# Altium PCB PCB2.PcbDoc
Units mil, origin at the board's own origin, x right, y up, seen from the top; angles counter-clockwise.
Board outline 2365 x 3675 mil, 2 copper layers (Top Layer, Bottom Layer); 23 components, 35 nets, 136 pads, 30 vias.
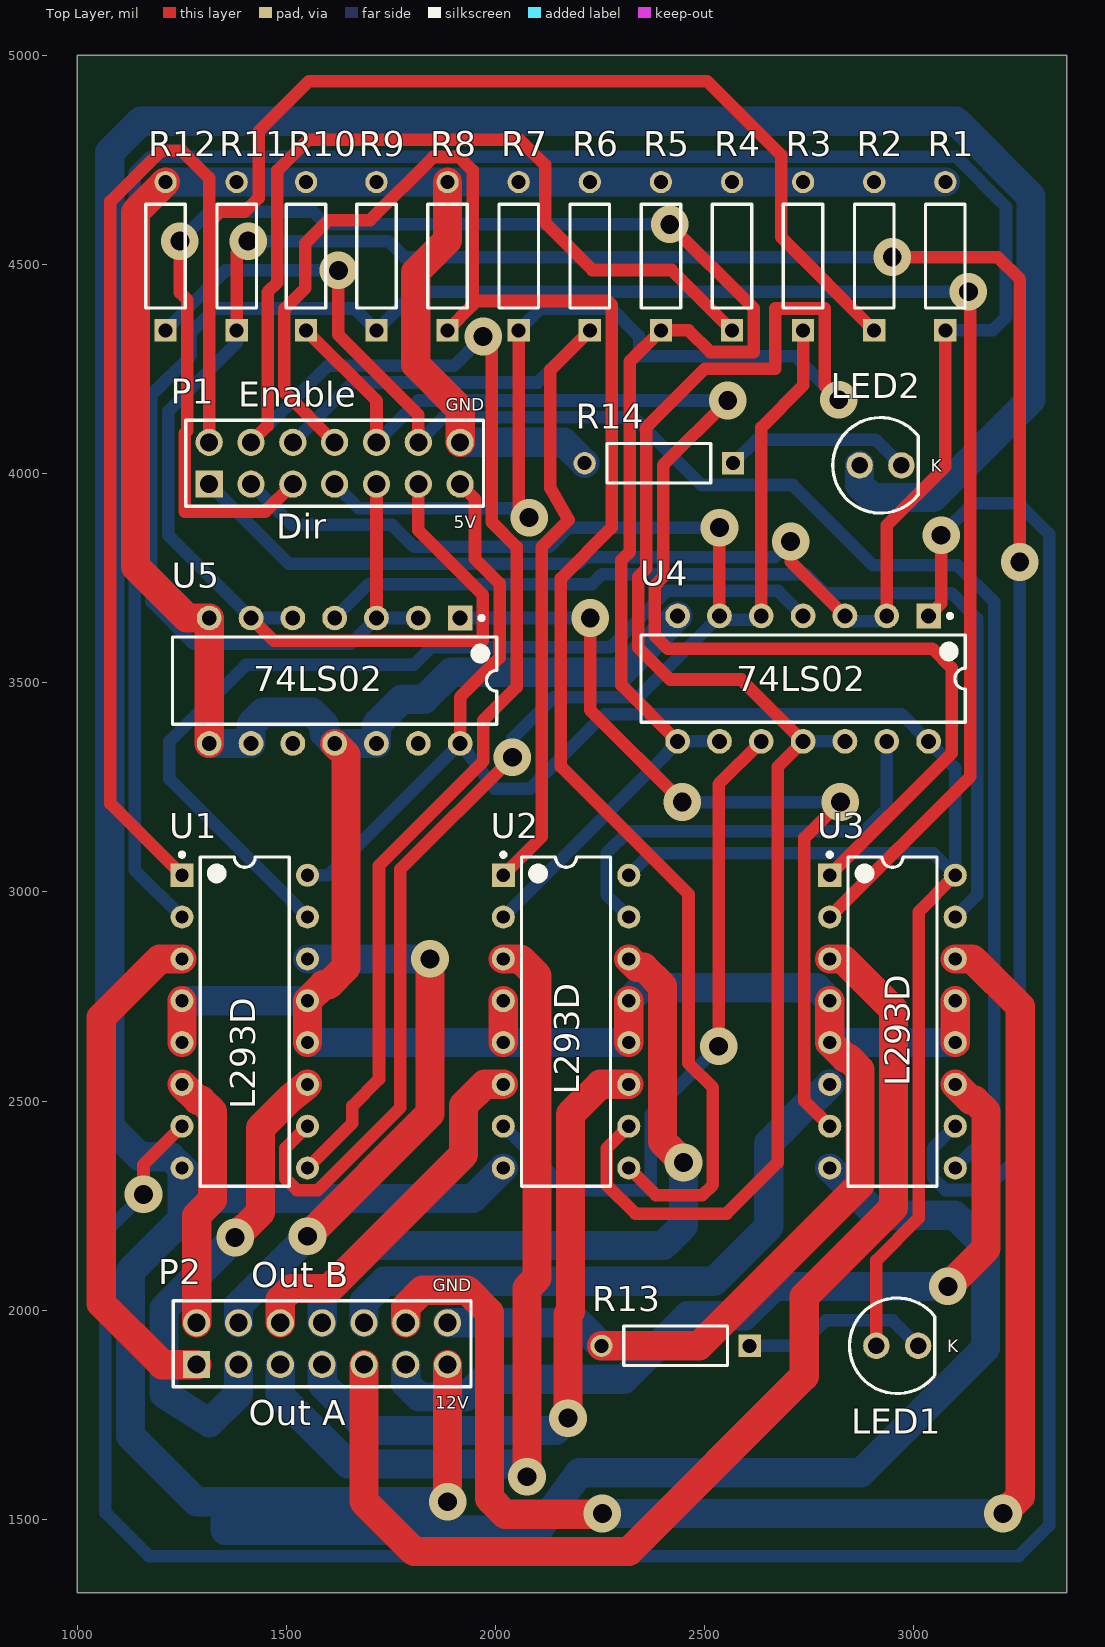
[diagram p0: Top Layer view]
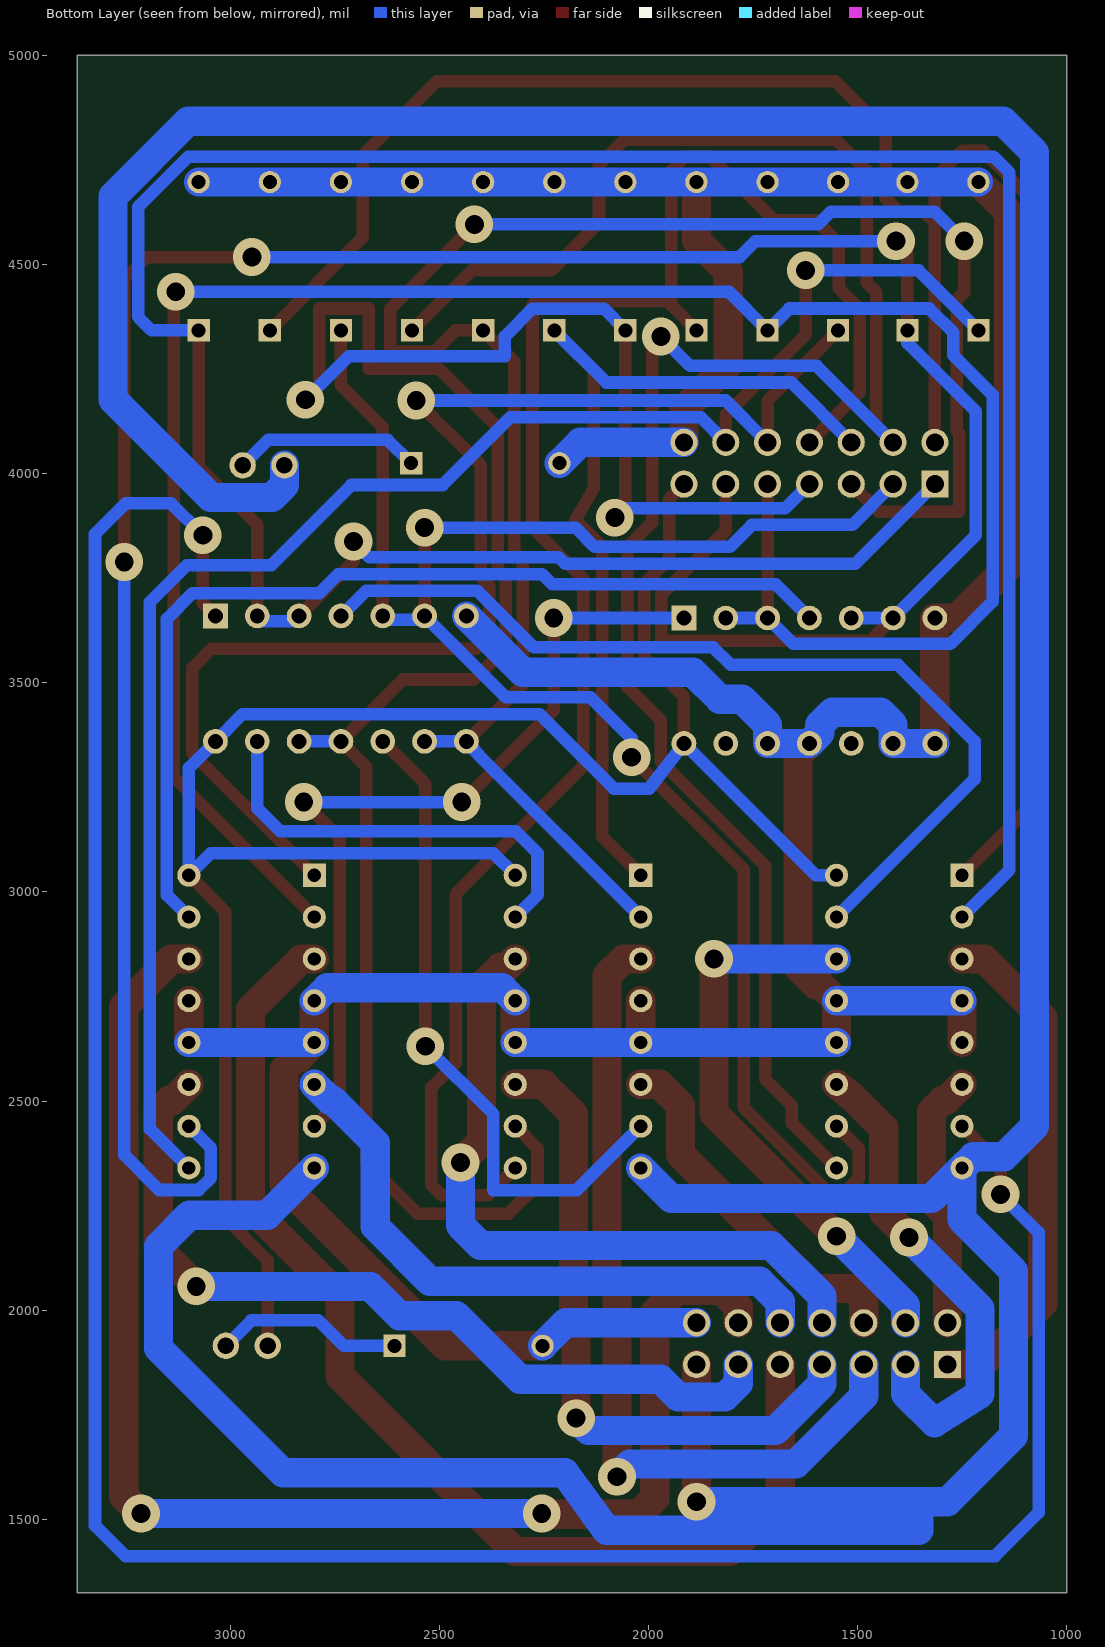
[diagram p1: Bottom Layer view, seen from below]

## Layer stack, top to bottom
Top Solder: solder mask 0.4, Solder Resist, Dk 3.5
Top Layer: signal copper 1.4
Dielectric 1: dielectric 12.6, FR-4, Dk 4.8
Bottom Layer: signal copper 1.4
Bottom Solder: solder mask 0.4, Solder Resist, Dk 3.5

## Board outline
1000,1325 3365,1325 3365,5000 1000,5000
board region "Default Layer Stack Region": 1000,1325 3365,1325 3365,5000 1000,5000
board region "Default Layer Stack Region": 1000,1325 3365,1325 3365,5000 1000,5000
board region "Default Layer Stack Region": 1000,1325 3365,1325 3365,5000 1000,5000

## Design rules (kind name [scope] priority, off if disabled: settings)
Clearance [All] p1: gap=10 ignorepadtopadclearanceinfootprint=FALSE except(0: Arc-Hole Track-Hole SMDPad-Hole THPad-Hole Via-Hole Fill-Hole Poly-Hole Region-Hole Text-Hole)
PolygonConnect [All] p1: connectstyle=Relief reliefconductorwidth=10 reliefentries=4 polygonreliefangle="90 Angle" airgapwidth=10
RoomDefinition Schematic [InComponentClass('Schematic')] p1: confinementstyle=ConfineIn formatcopy=TRUE lockcomponents=FALSE outline 7045,1060 12960,1060 12960,2010 7045,2010
RoutingVias [All] p1: holewidth=45 width=90 viastyle="Through Hole" minholewidth=45 minwidth=90 maxholewidth=45 maxwidth=90
SolderMaskExpansion [All] p1: expansion=4 istentingtop=FALSE
Width PowerNets [InNetClass('PowerNets')] p1: maxlimit=70 minlimit=70 preferedwidth=70 minimp=50.000000 maximp=50.000000 favimp=50.000000
Width [All] p2: maxlimit=30 minlimit=30 preferedwidth=30 minimp=50.000000 maximp=50.000000 favimp=50.000000
30 further rules are at their usual default settings.

## Classes and differential pairs
net class PowerNets: +12 GND NetP2_1 NetP2_2 NetP2_3 NetP2_4 NetP2_5 NetP2_6 NetP2_7 NetP2_8 NetP2_9 NetP2_10 NetP2_11 NetP2_12

## Components (designator, comment, footprint, x,y, rotation, side; value= is the part's Value field where it differs from the comment)
LED1 "151051VS04000" "Type 5mm" 2960,1915 r0 top
LED2 "151051VS04000" "Type 5mm" 2920,4020 r0 top
P1 "61301421121" 61301421121 1615,4025 r0 top
P2 "61301421121" 61301421121 1585,1920 r0 top
R1 "MFR-25FBF52-1K" RESA60-630X240 3075,4520 r90 top
R2 "MFR-25FBF52-1K" RESA60-630X240 2905,4520 r90 top
R3 "MFR-25FBF52-1K" RESA60-630X240 2735,4520 r90 top
R4 "MFR-25FBF52-1K" RESA60-630X240 2565,4520 r90 top
R5 "MFR-25FBF52-1K" RESA60-630X240 2395,4520 r90 top
R6 "MFR-25FBF52-1K" RESA60-630X240 2225,4520 r90 top
R7 "MFR-25FBF52-1K" RESA60-630X240 2055,4520 r90 top
R8 "MFR-25FBF52-1K" RESA60-630X240 1885,4520 r90 top
R9 "MFR-25FBF52-1K" RESA60-630X240 1715,4520 r90 top
R10 "MFR-25FBF52-1K" RESA60-630X240 1546.59,4520 r90 top
R11 "MFR-25FBF52-1K" RESA60-630X240 1380.74,4520 r90 top
R12 "MFR-25FBF52-1K" RESA60-630X240 1210.81,4520 r90 top
R13 "MFR-25FBF52-1K" RESA60-630X240 2430,1915 r180 top
R14 "MFR-25FBF52-1K" RESA60-630X240 2390,4025 r180 top
U1 "L293D" STM-L293D-16 1400,2690 r0 top
U2 "L293D" STM-L293D-16 2168.2,2690 r0 top
U3 "L293D" STM-L293D-16 2948.66,2690 r0 top
U4 "SN74LS02N" N0014A 2735,3510 r270 top
U5 "SN74LS02N" N0014A 1615,3505 r270 top

## Footprints (in the part's own frame and the unit in brackets; to place one, negate y for a bottom-side part, rotate by r counter-clockwise, add the part's x,y. Pads: shape width x height; smd on the part's side, far side on the other; paste and mask are expansions set on the pad)
61301421121 [mm] "Pin Header, pitch 2.54 mm, THT, Vertical, dual row, 14p"
  rect 1.65x1.65 hole 1.1: 1(-7.62,-1.27)
  round 1.65 hole 1.1: 2(-7.62,1.27) 3(-5.08,-1.27) 4(-5.08,1.27) 5(-2.54,-1.27) 6(-2.54,1.27) 7(0,-1.27) 8(0,1.27) 9(2.54,-1.27) 10(2.54,1.27) 11(5.08,-1.27) 12(5.08,1.27) 13(7.62,-1.27) 14(7.62,1.27)
  silkscreen extent -9.04,-2.61 9.04,2.61, body extent -8.89,-2.54 8.89,2.54, height 8.59
N0014A [mm] "DIP, 14-Leads, Body 19.7x6.6mm, Pitch 2.54mm"
  rect 1.5x1.5 hole 0.9: 1(-3.81,7.62)
  round 1.5 hole 0.9: 2(-3.81,5.08) 3(-3.81,2.54) 4(-3.81,0) 5(-3.81,-2.54) 6(-3.81,-5.08) 7(-3.81,-7.62) 8(3.81,-7.62) 9(3.81,-5.08) 10(3.81,-2.54) 11(3.81,0) 12(3.81,2.54) 13(3.81,5.08) 14(3.81,7.62)
  silkscreen extent -3.93,-9.85 2.65,9.85, body extent -3.95,-9.85 3.95,9.85, height 5.08
RESA60-630X240 [mm] "Axial Resistor, 2-Leads, Dia 2.4mm, Body Length 6.3mm"
  rect 1.35x1.35 hole 0.85: 1(-4.5,0)
  round 1.35 hole 0.85: 2(4.5,0)
  silkscreen extent -3.15,-1.2 3.15,1.2, body extent -3.15,-1.2 3.15,1.2, height 2.4
STM-L293D-16 [mm] "DIP, 16-Leads, Body 20x6.85mm, Pitch 2.54mm"
  rect 1.4x1.4 hole 0.8: 1(-3.81,8.89)
  round 1.4 hole 0.8: 2(-3.81,6.35) 3(-3.81,3.81) 4(-3.81,1.27) 5(-3.81,-1.27) 6(-3.81,-3.81) 7(-3.81,-6.35) 8(-3.81,-8.89) 9(3.81,-8.89) 10(3.81,-6.35) 11(3.81,-3.81) 12(3.81,-1.27) 13(3.81,1.27) 14(3.81,3.81) 15(3.81,6.35) 16(3.81,8.89)
  silkscreen extent -3.93,-10 2.7,10.26, body extent -3.93,-10 3.93,10, height 5.1
"Type 5mm" [mm] "THT, LED-5mm, 2pin- Body 5.8mm"
  round 1.6 hole 1: 1(1.27,0) 2(-1.27,0)
  silkscreen extent -2.9,-2.9 2.29,2.9, body extent -2.9,-2.9 2.5,2.9, height 11.7

## Part data
LED1 LED2: library part CMP-1488-00007-1, "THT LED round mono-color color lens, WL-TMRW, Bright Green", Emitting color="Bright Green", Manufacturer="Wuerth Elektronik", ComponentLink1Description="Manufacturer URL", ComponentLink1URL=http://www.we-online.com, ComponentLink2Description=Datasheet, ComponentLink2URL=http://katalog.we-online.de/pbs/datasheet/7448042001.pdfhttp://katalog.we-online.de/pbs/datasheet/7448042001.pdfhttp://katalog.we-online.de/pbs/datasheet/7448042001.pdfhttp://katalog.we-online.de/pbs/datasheet/151051VS04000.pdf, PackageReference="Type 5mm", PartNumber=151051VS04000
P1 P2: library part CMP-1502-01093-1, "THT Vertical Pin Header WR-PHD, Pitch 2.54 mm, Dual Row, 14 pins", Contact Resistance=20mOhm, Manufacturer="Wurth Elektronik", Operating Temperature=-40to105degC, Rated Current=3A, Withstanding Voltage=500VAC, Working Voltage=250VAC, Datasheet URL=https://katalog.we-online.de/em/datasheet/6130xx21121.pdf, Gender=Male, Manufacturer URL=http://www.we-online.de, Mounting Technology=THT, Orientation=Vertical, Package Reference=61301421121, Packaging=Bag, Part Number=61301421121, Pin Number=14, Pitch=2.54mm, Publisher=WurthElektronik, Row Number=Dual
R1 R2 R3 R4 R5 R6 R7 R8 R9 R10 R11 R12 R13 R14: library part CMP-1659-00075-1, "Axial Resistor, 1 KOhm, +/- 1%, 250 mW, -55 to 155 degC, 2-Pin THD, RoHS, Bulk", Case\Package=Axial, Max Operating Temperature="155 degC", Min Operating Temperature="-55 degC", Package Quantity=200, Power Rating="250 mW", Resistance="10 kohm", Tolerance=1%, Voltage Rating="250 V", ComponentLink1Description="Manufacturer URL", ComponentLink1URL=http://www.yageo.com/, ComponentLink2Description=Datasheet, ComponentLink2URL=http://www.yageo.com/documents/recent/Yageo%20LR_MFR_2013.pdf, DatasheetVersion=Apr-13, Length="0.248 inch", PackageDescription="2-Pin Axial Lead, Dia 2.4 mm, Body Length 6.3 mm", PackageReference=MFR-25, Packaging=Bulk, RoHSCompliant=true
U1 U2 U3: library part CMP-2000-06524-1, "Push-Pull Four Channel Driver with Diode, 4.5 to 36 V, -40 to 150 degC, 16-Pin PDIP, RoHS, Tube", Current - Output / Channel=600mA, Current - Peak Output=1.2A, Manufacturer=STMicroelectronics, On-State Resistance=-, Operating Temperature=-40°C~150°C, Package / Case="16-DIP(0.300\",7.62mm)", Package Description="16-Pin Thru-Hole Dual-In-Line, Body 20 x 6.85 mm, Pitch 2.54 mm", Package Reference=DIP-16, Standard Package=25, Supplier Device Package=16-PowerDIP, Voltage - Supply=4.5V~36V, Category=IntegratedCircuits(ICs), Datasheet URL=http://www.st.com/st-web-ui/static/active/en/resource/technical/document/datasheet/CD00000059.pdf, Datasheet Version=07/2003, Dynamic Catalog=HalfBridge, Family=PMIC-MOSFET,BridgeDrivers-InternalSwitch, Input Type=Non-Inverting, Manufacturer URL=http://www.st.com/, Mounting Technology=ThroughHole, Mounting Type=ThroughHole, Number of Outputs=4, Other Names=497-2936-5, Other Related Documents=L293DViewAllSpecifications, Packaging=Tube, PartNumber=L293D, Series=-, Type=HalfBridge
U4 U5: library part CMP-0806-00181-3, "Quad 2-input positive-NOR gates, N0014A, TUBE", F @ Nom Voltage(Max)(Mhz)=35, Generic Part Number=SN74LS02, ICC @ Nom Voltage(Max)(mA)=0.027, Manufacturer="Texas Instruments", Operating Temperature Range(C)="0 to 70", Rating=Catalog, tpd @ Nom Voltage(Max)(ns)=22, Voltage(Nom)(V)=5, Bits(#)=4, Code_JEDEC=MS-001, DatasheetVersion=SDLS027, Input Type=TTL, Output Drive (IOL/IOH)(Max)(mA)=0.4/-8, Output Type=TTL, PackageReference=N0014A, PackageVersion=http://www.ti.com/lit/ml/mpdi002c/mpdi002c.pdf, VCC(Max)(V)=5.25, VCC(Min)(V)=4.75

## Via types
v1: diameter 90, hole 45, Top Layer to Bottom Layer, 30 vias

## Nets (pads, with @x,y where several pads share a name; then routed paths per layer and width w, separated by ;. In a path a pad name is that pad's centre, name@x,y a point inside that pad or via, vN(x,y) a via of type N, cw(c..) or ccw(c..) an arc to the next point about the centre after c; other vN are vias at no path point)
+5: LED1.2 P1.13 U1.16 U2.16 U3.16 U4.14 U5.14 | length 4841.4
  Top Layer w30: U5.14 1915,3465.94 2009.53,3560.47 2009.53,3737.5 1950.57,3796.45 1950.57,3939.43 P1.13 ; LED1.2 2910,2119 3011.22,2220.22 3011.22,2952.56 U3.16
  Bottom Layer w30: U1.16 1600,3040 U5.14 1997.87,3247.13 2082.13,3247.13 2260,3425 2970,3425 U4.14 3098.66,3296.34 U3.16 3045.66,3093 2371.2,3093 U2.16
+12: LED2.2 P2.13 U1.8 U2.8 U3.8 | length 11347.9
  Top Layer w70: v1(1885,1542) P2.13
  Bottom Layer w70: v1(1885,1542) 1353.3,1542 ; U2.8 1945.2,2267 1323,2267 U1.8 ; U3.8 2911.22,2227.44 3096.86,2227.44 3171.22,2153.08 3171.22,1909.22 2873.33,1611.33 2200,1611.33 2100,1473.7 1353.3,1473.7 1353.3,1542 ; LED2.2 2870,3973 2900,3943 3046,3943 3280,4177 3280,4663 3100.19,4842.81 1151.81,4842.81 1077,4768 1077,2440 1150,2367 1223,2367 U1.8 ; U1.8 1250,2217 1127,2094 1127,1700 1285,1542 1353.3,1542
GND: P1.14 P2.14 R1.2 R2.2 R3.2 R4.2 R5.2 R6.2 R7.2 R8.2 R9.2 R10.2 R11.2 R12.2 R13.2 R14.2 U1.4 U1.5 U1.12 U1.13 U2.4 U2.5 U2.12 U2.13 U3.4 U3.5 U3.12 U3.13 U4.7 U5.7 U5.8 U5.9 U5.11 U5.12 | length 10417.8
  Top Layer w70: R12.2 1139,4625.36 1139,3777.81 1261.81,3655 U5.7 U5.8 ; U1.5 U1.4 ; U1.12 U1.13 1588,2778 1600,2778 1642,2820 1642,3328 U5.11 ; R8.2 1885,4558 1809,4482 1809,4261 1915,4155 P1.14 ; U2.5 U2.4 ; R13.2 2486.22,1915 2871.22,2300 2871.22,2575 2843.56,2602.66 2836,2602.66 U3.5 U3.4 ; U2.12 U2.13 ; U3.12 U3.13
  Bottom Layer w70: R12.2 R11.2 R10.2 R9.2 R8.2 R7.2 R6.2 R5.2 R4.2 R3.2 R2.2 R1.2 ; U1.4 U1.13 ; U5.8 U5.9 1415,3400 1445,3430 1560,3430 1590,3400 1590,3380 U5.11 U5.12 1715,3400 1776,3461 1829.36,3461 1893.36,3525 2300,3525 U4.7 ; U1.12 U2.5 U2.12 ; P2.14 2197.83,1970 R13.2 ; P1.14 2162.83,4075 R14.2 ; U2.13 2349.2,2771 2767.66,2771 U3.4 ; U3.5 U3.12
NetLED1_1: LED1.1 R13.1 | length 453.4
  Bottom Layer w30: R13.1 2728,1915 2789,1976 2949,1976 LED1.1
NetLED2_1: LED2.1 R14.1 | length 451.3
  Bottom Layer w30: R14.1 2623.17,4081 2909,4081 LED2.1
NetP1_1: P1.1 R1.1 U1.2 U4.2 U4.3 | length 6970.3
  Top Layer w30: v1(2705,3838) 2705,3790 U4.3 ; U4.2 2935,3876.84 3075,4016.84 R1.1
  Bottom Layer w30: U1.2 1137,3053 1137,4720 1175,4758 3100,4758 3220,4638 3220,4375 3187.83,4342.83 R1.1 ; P1.1 1505,3785 2198.82,3785 2214.48,3800.66 2667.66,3800.66 v1(2705,3838) ; U4.3 2847.5,3647.5 2922.5,3647.5 U4.2
NetP1_2: P1.2 R2.1 U1.1 | length 4811.5
  Top Layer w30: U1.1 1079,3211 1079,4651 1200,4772 1250,4772 1315,4707 1315,4600 ; P1.2 1315,4600 ; R2.1 2683,4564.83 2683,4761 2506,4938 1553,4938 1433,4818 1433,4659 1400,4626 1341,4626 1315,4600
NetP1_3: P1.3 R3.1 U1.10 U4.5 U4.6 | length 4369.1
  Top Layer w30: U1.10 1497.44,2387.44 1497.44,2314.56 1525,2287 1575,2287 1772.35,2484.35 1772.35,3054.35 v1(2040,3322) ; U4.6 v1(2535,3871) ; U4.5 2635,4111 2735,4211 R3.1
  Bottom Layer w30: P1.3 1512.48,3877.52 1752.48,3877.52 1805,3825 2128.48,3825 2174.48,3871 v1(2535,3871) ; v1(2040,3322) 2040,3367.13 2137.87,3465 2340,3465 U4.6 2544,3651 2626,3651 U4.5
NetP1_4: P1.4 R4.1 U1.9 | length 4950.7
  Top Layer w30: P1.4 1455,4115 1455,4434 1478,4457 1478,4725 1551,4798 2058,4798 2118,4738 2118,4600 2231,4487 2420.83,4487 R4.1 ; U1.9 1657.14,2447.14 1657.14,2488.71 1721,2552.57 1721,3063 1970,3312 1970,3410 2050,3490 2050,3825 1990.57,3884.43 1990.57,4307.43 v1(1970,4328)
  Bottom Layer w30: P1.4 1598,4258 1900,4258 v1(1970,4328)
NetP1_5: P1.5 R5.1 U2.2 U4.8 U4.9 | length 4555.9
  Top Layer w30: v1(1245,4556) 1245,4433 1263,4415 1263,4103 1257,4097 1257,3909 1449,3909 P1.5 ; v1(2416,4596) 2617,4395 2617,4291 2513,4291 2461.17,4342.83 R5.1 2320.47,4268.31 2320.47,3813.26 2300.47,3793.26 2300.47,3494.53 U4.8
  Bottom Layer w30: v1(1245,4556) 1315,4626 1564,4626 1594,4596 v1(2416,4596) ; U2.2 2403.2,3325 U4.8 U4.9
NetP1_6: P1.6 R6.1 U2.1 | length 2239.5
  Top Layer w30: U2.1 2110,3131.8 2110,3825 2174.48,3889.48 2130.57,3965 2130.57,4248.41 R6.1
  Bottom Layer w30: P1.6 1658,4218 2100.17,4218 R6.1
NetP1_7: P1.7 R7.1 U2.10 U4.11 U4.12 | length 5525.9
  Top Layer w30: R7.1 2055,3920 v1(2080,3895) ; U2.10 2265,2386.8 2265,2300 2334,2231 2552.34,2231 2674,2352.66 2674,3299 U4.11 2587,3508 2417,3508 2340.47,3584.53 2340.47,3753 2360.47,3773 2360.47,4111.47 2500,4251 2668,4251 2668,4395 2787,4395 2787,4210 v1(2820,4177)
  Bottom Layer w30: P1.7 1672.48,3917.52 2057.48,3917.52 v1(2080,3895) ; R7.1 2106.58,4394.41 2277,4394.41 2343,4328.41 2343,4281 2716,4281 v1(2820,4177) ; U4.11 U4.12
NetP1_8: P1.8 R8.1 U2.9 | length 4334.5
  Top Layer w30: P1.8 1495.02,4194.98 1495.02,4394 1545,4443.98 1545,4551 1600,4606 1700,4606 1851.17,4757.17 1912.83,4757.17 1945,4725 1945,4402.83 ; R8.1 1945,4402.83 ; U2.9 2383.2,2275 2494,2275 2519,2300 2519,2532 2461,2590 2461,2995 2156,3300 2156,3750 2277,3871 2277,4404 2268.17,4412.83 1955,4412.83 1945,4402.83
NetP1_9: P1.9 R9.1 U3.2 U5.2 U5.3 | length 5286.7
  Top Layer w30: U5.3 P1.9 ; U3.2 3135.03,3276.36 3135.03,4429.97 v1(3130,4435)
  Bottom Layer w30: U5.2 U5.3 1653,3593 1278,3593 1177,3694 1177,4188.75 1271,4282.75 1271,4337 1329,4395 1662.83,4395 R9.1 1807.17,4435 v1(3130,4435)
NetP1_10: P1.10 R10.1 U3.1 | length 3211.7
  Top Layer w30: R10.1 1715,4174.43 P1.10 ; v1(2555,4175) 2400.47,4020.47 2400.47,3753.26 2380.47,3733.26 2380.47,3612.53 2411,3582 3044,3582 3090,3536 3090,3331.34 U3.1
  Bottom Layer w30: P1.10 1815,4175 v1(2555,4175)
NetP1_11: P1.11 R11.1 U3.10 U5.5 U5.6 | length 6553.5
  Top Layer w30: R11.1 1380.74,4528.74 v1(1408,4556) ; U5.6 1469.53,3600.47 1969.53,3600.47 1969.53,3710 1815,3864.53 P1.11 ; v1(2948,4518) 3200,4518 3253,4465 v1(3253,3789)
  Bottom Layer w30: R11.1 1380.74,4312.49 1217,4148.75 1217,3853 U5.6 U5.5 ; v1(1408,4556) 1744,4556 1782,4518 v1(2948,4518) ; U3.10 3046,2387.34 3046,2316.44 3075,2287.44 3169.44,2287.44 3253,2371 v1(3253,3789)
NetP1_12: P1.12 R12.1 U3.9 | length 3939.2
  Top Layer w30: v1(1624,4486) 1624,4331.79 1815,4140.79 P1.12
  Bottom Layer w30: R12.1 1353.97,4486 v1(1624,4486) ; P1.12 1875,4135 2330,4135 2492,3973 2710,3973 2902,3781 3104,3781 3192,3693 3192,2433.34 U3.9
NetP2_1: P2.1 U1.3 | length 1223.5
  Top Layer w70: U1.3 1197,2840 1057,2700 1057,2016 1203,1870 P2.1
NetP2_2: P2.2 U1.6 | length 620.7
  Top Layer w70: U1.6 1288,2502 1296,2502 1323,2475 1323,2264 1285,2226 P2.2
NetP2_3: P2.3 U1.11 | length 1181.3
  Top Layer w70: v1(1377,2174) 1437.44,2234.44 1437.44,2435.44 1507,2505 U1.11
  Bottom Layer w70: v1(1377,2174) 1207,2004 1207,1800 1316,1731 1385,1800 P2.3
NetP2_4: P2.4 U1.14 | length 1352.7
  Top Layer w70: v1(1550,2177) 1843,2470 v1(1843,2840)
  Bottom Layer w70: P2.4 1385,2012 v1(1550,2177) ; U1.14 v1(1843,2840)
NetP2_5: P2.5 U2.3 | length 2050.2
  Top Layer w70: U2.3 2059,2840 2099,2800 2099,2076.9 2075,2052.9 v1(2075,1602)
  Bottom Layer w70: P2.5 1485,1795.04 1647.52,1632.52 2044.48,1632.52 v1(2075,1602)
NetP2_6: P2.6 U2.6 | length 870.4
  Top Layer w70: P2.6 1485,2025 1512,2052 1602.62,2052 1923.19,2372.57 1923.19,2490.19 1973,2540 U2.6
NetP2_7: P2.7 U2.11 | length 1590.4
  Top Layer w70: v1(2172.83,1742) 2172.83,1990.73 2179,1996.9 2179,2469 2250,2540 U2.11
  Bottom Layer w70: P2.7 1585,1823.95 1696.44,1712.52 2143.35,1712.52 v1(2172.83,1742)
NetP2_8: P2.8 U2.14 | length 1698.5
  Top Layer w70: U2.14 2338.2,2820 2354,2820 2399,2775 2399,2403.35 v1(2449,2353.35)
  Bottom Layer w70: P2.8 1585,2033.92 1706.08,2155 2401.15,2155 2449,2202.85 v1(2449,2353.35)
NetP2_9: P2.9 U3.3 | length 2770.4
  Top Layer w70: P2.9 1685,1543.11 1805,1423.11 2318.11,1423.11 2737.39,1842.39 2737.39,2032 2951.22,2245.83 2951.22,2718.78 2830,2840 U3.3
NetP2_10: P2.10 U3.6 | length 1496.2
  Bottom Layer w70: P2.10 1685,2020 1734,2069 2522,2069 2653,2200 2653,2400 2755.34,2502.34 2761,2502.34 U3.6
NetP2_11: P2.11 U3.11 | length 2020
  Top Layer w70: v1(3081,2057) 3172,2148 3172,2475 3145,2502 3136.66,2502 U3.11
  Bottom Layer w70: P2.11 1785,1825 1817.48,1792.52 1928.52,1792.52 1971,1835 2307,1835 2459,1987 2595,1987 2665,2057 v1(3081,2057)
NetP2_12: P2.12 U3.14 | length 3397
  Top Layer w70: P2.12 1785,2008 1825,2048 1931,2048 1985,1994 1985,1550 2023,1512 2253,1512 v1(2255,1514) ; U3.14 3140,2840 3253.92,2726.08 3253.92,1554.92 v1(3213,1514)
  Bottom Layer w70: v1(2255,1514) v1(3213,1514)
NetU1_7: U1.7 U4.1 | length 6225
  Top Layer w30: v1(1158,2277) 1158,2348 U1.7 ; U4.1 3065,3690 v1(3065,3853)
  Bottom Layer w30: v1(1158,2277) 1067,2186 1067,1516 1171,1412 3250,1412 3323,1485 3323,3855.84 3250,3928.84 3140.84,3928.84 v1(3065,3853)
NetU1_15: U1.15 U4.4 | length 2245.7
  Bottom Layer w30: U1.15 1220,3270 1220,3360 1403,3543 1803,3543 1845,3585 2274,3585 2409,3720 2675,3720 U4.4
NetU2_7: U2.7 U4.10 | length 1598.4
  Top Layer w30: v1(2533,2631) 2533,3258 U4.10
  Bottom Layer w30: U2.7 2171.2,2287 2370.76,2287 2370.76,2468.76 v1(2533,2631)
NetU2_15: U2.15 U4.13 | length 1049.4
  Bottom Layer w30: U2.15 2265,2993.2 2265,3093 2317,3145 2880,3145 2935,3200 U4.13
NetU3_7: U3.7 U5.1 | length 2055.9
  Top Layer w30: v1(2226,3655) 2226,3435 v1(2446,3215) ; U3.7 2738,2500.66 2738,3129 v1(2824,3215)
  Bottom Layer w30: U5.1 v1(2226,3655) ; v1(2446,3215) v1(2824,3215)
NetU3_15: U3.15 U5.4 | length 2358.7
  Bottom Layer w30: U5.4 1695.73,3735.73 2230.21,3735.73 2254.48,3760 2741,3760 2786.47,3714.53 3089.53,3714.53 3151.22,3652.83 3151.22,2992.56 U3.15
pads on no net: U5.10 U5.13

## Silkscreen, mask and mechanical layers (free items; w line width, h text height)
Top Overlay:
  text "Enable" at 1385,4160 h60
  text "GND" at 1880,4150 h30
  text "5V" at 1900,3870 h30
  text "Dir" at 1475,3845 h60
  text "74LS02" at 1420,3480 h60
  text "74LS02" at 2575,3480 h60
  text "L293D" at 2990,2535 h60 r90
  text "L293D" at 2200,2515 h60 r90
  text "L293D" at 1425,2480 h60 r90
  text "Out B" at 1415,2055 h60
  text "GND" at 1850,2045 h30
  text "12V" at 1855,1765 h30
  text "Out A" at 1410,1725 h60
Outline:
  the board outline again, w47.24

## Text inside footprints (layer, text, board x,y; h text height)
LED1: Mechanical 15 "K" at 3080,1900 h30; Top Overlay "K" at 3080,1900 h30
LED2: Mechanical 15 "K" at 3040,4005 h30; Top Overlay "K" at 3040,4005 h30